# Altium PCB PCB.PcbDoc (part 1 of 2)
Units mm, origin at the board's own origin, x right, y up, seen from the top; angles counter-clockwise.
Board outline 55 x 55 mm, 6 copper layers (Top Layer, Layer 1, Layer 3, Layer 4, Layer 2, Bottom Layer), stack 1.211 mm thick; 156 components, 99 nets, 477 pads, 0 vias.
Unrouted connection lines stored in the file: 307.
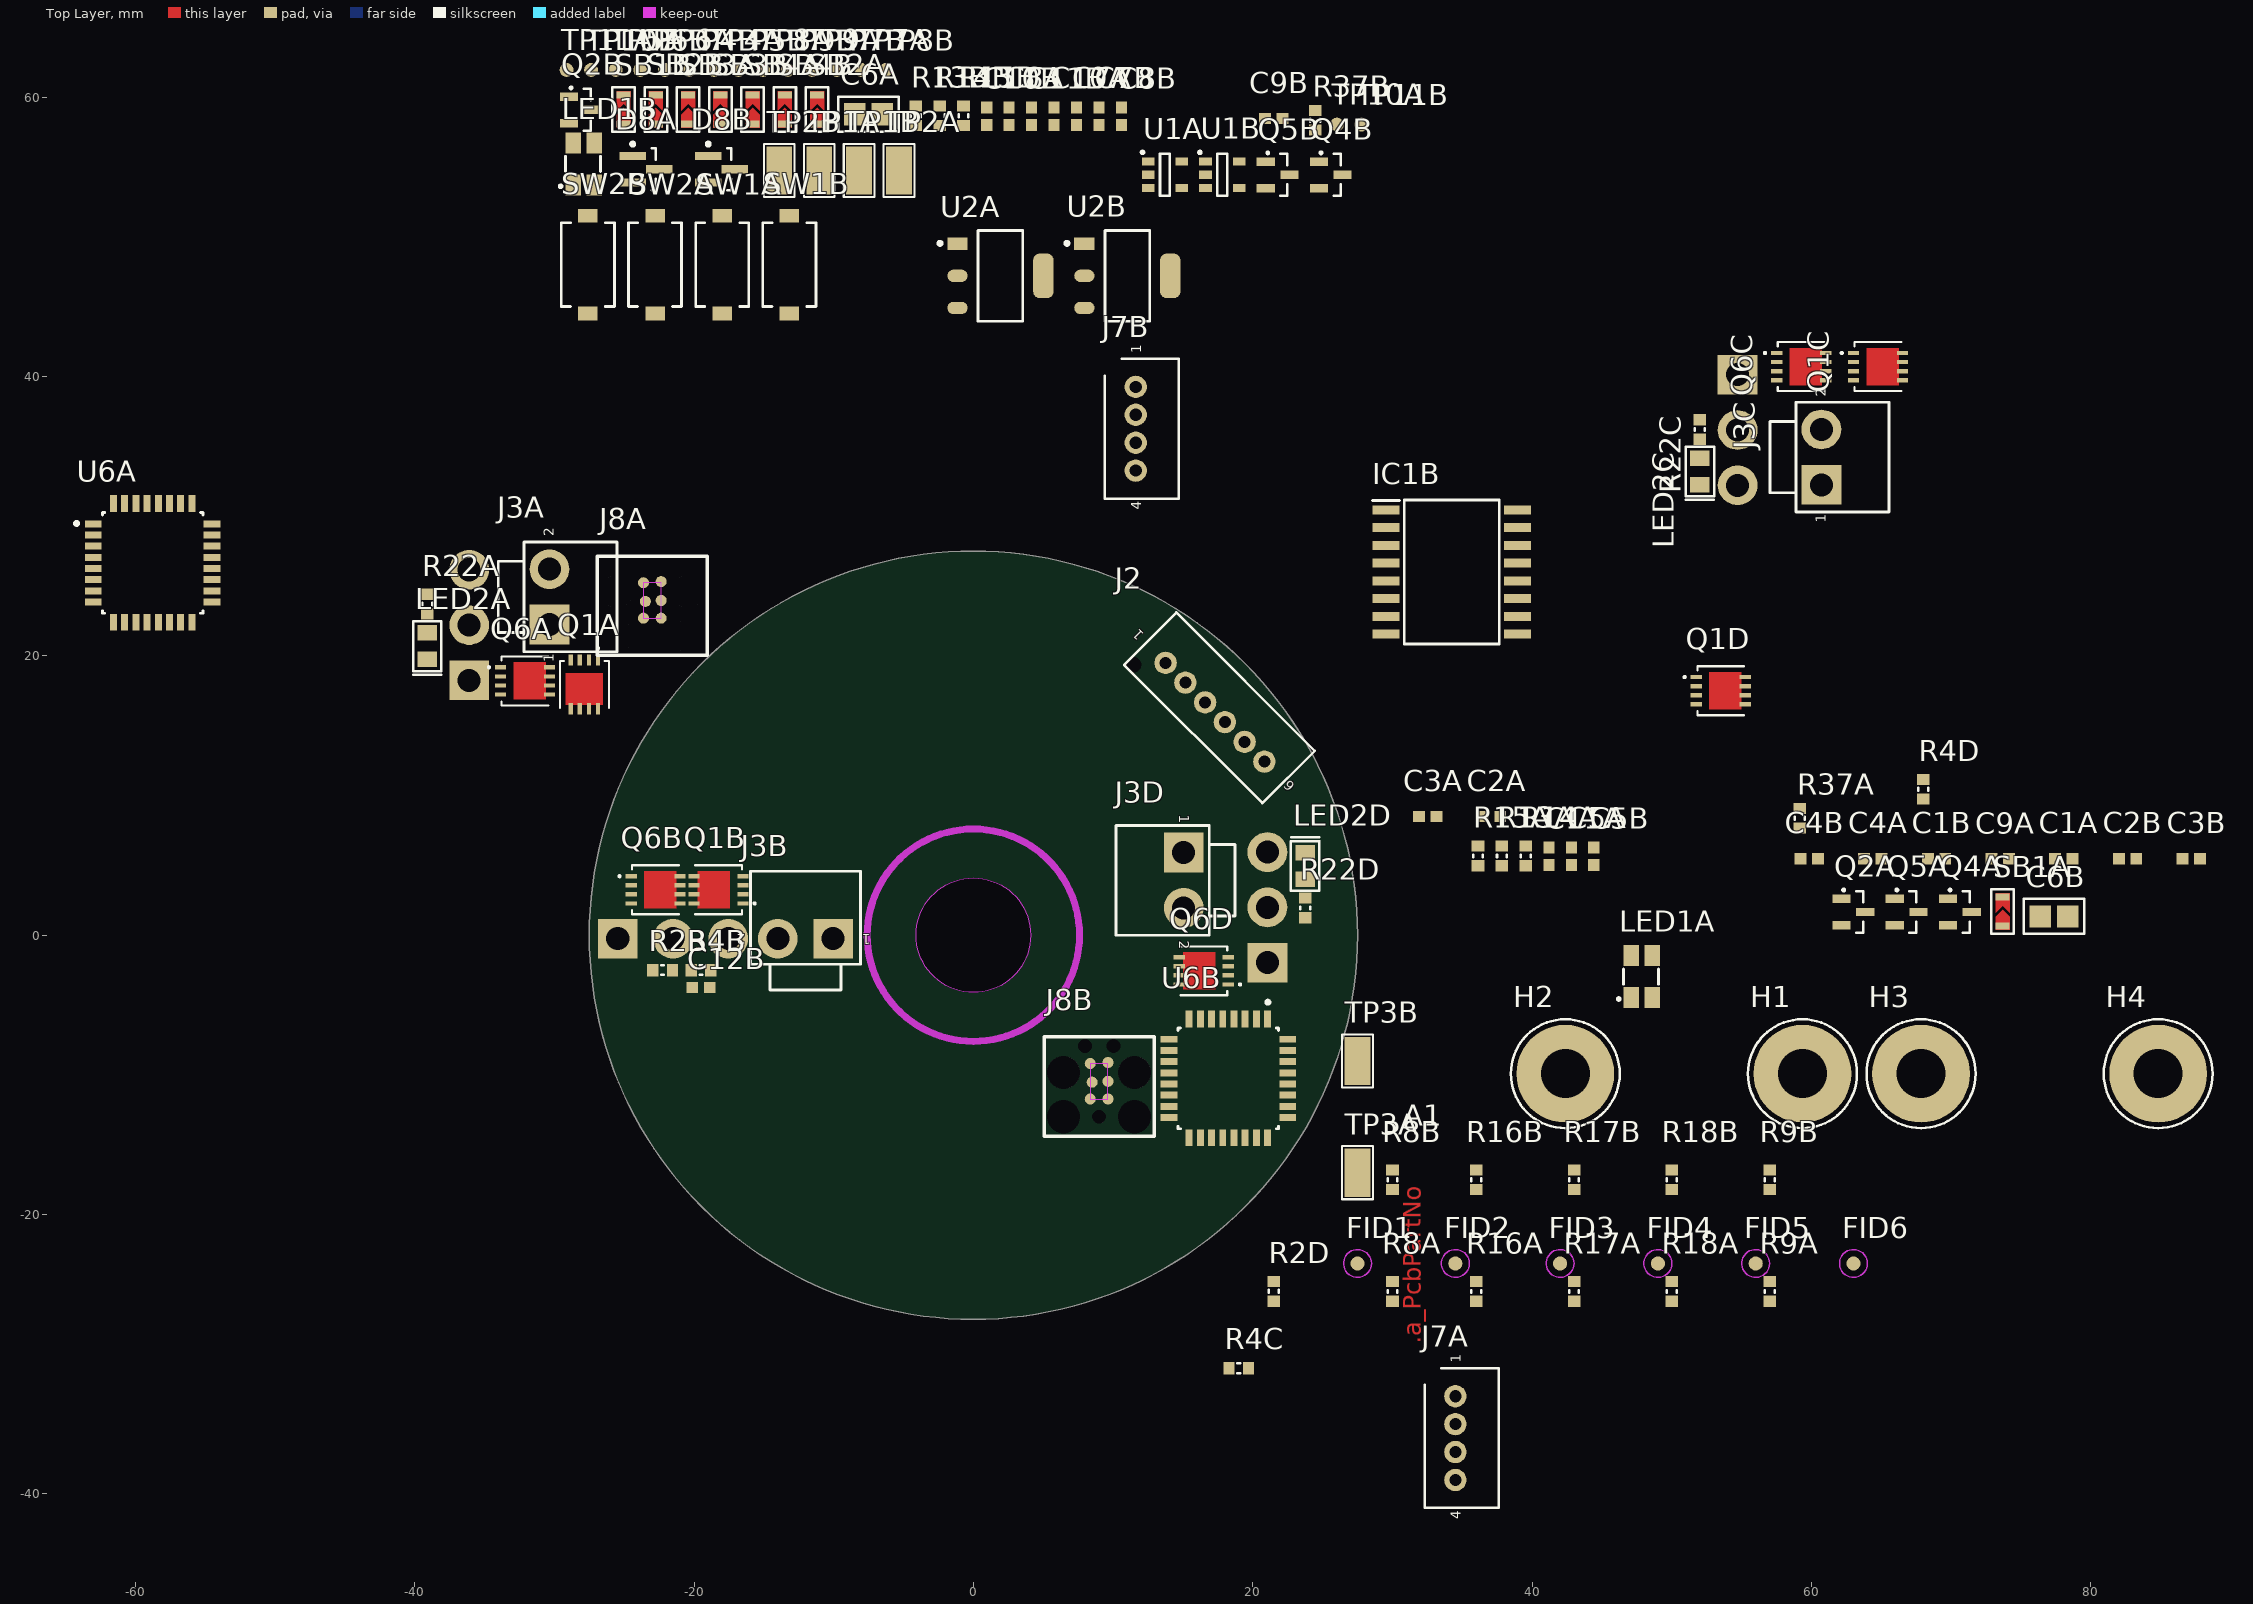
[diagram p0: Top Layer view]
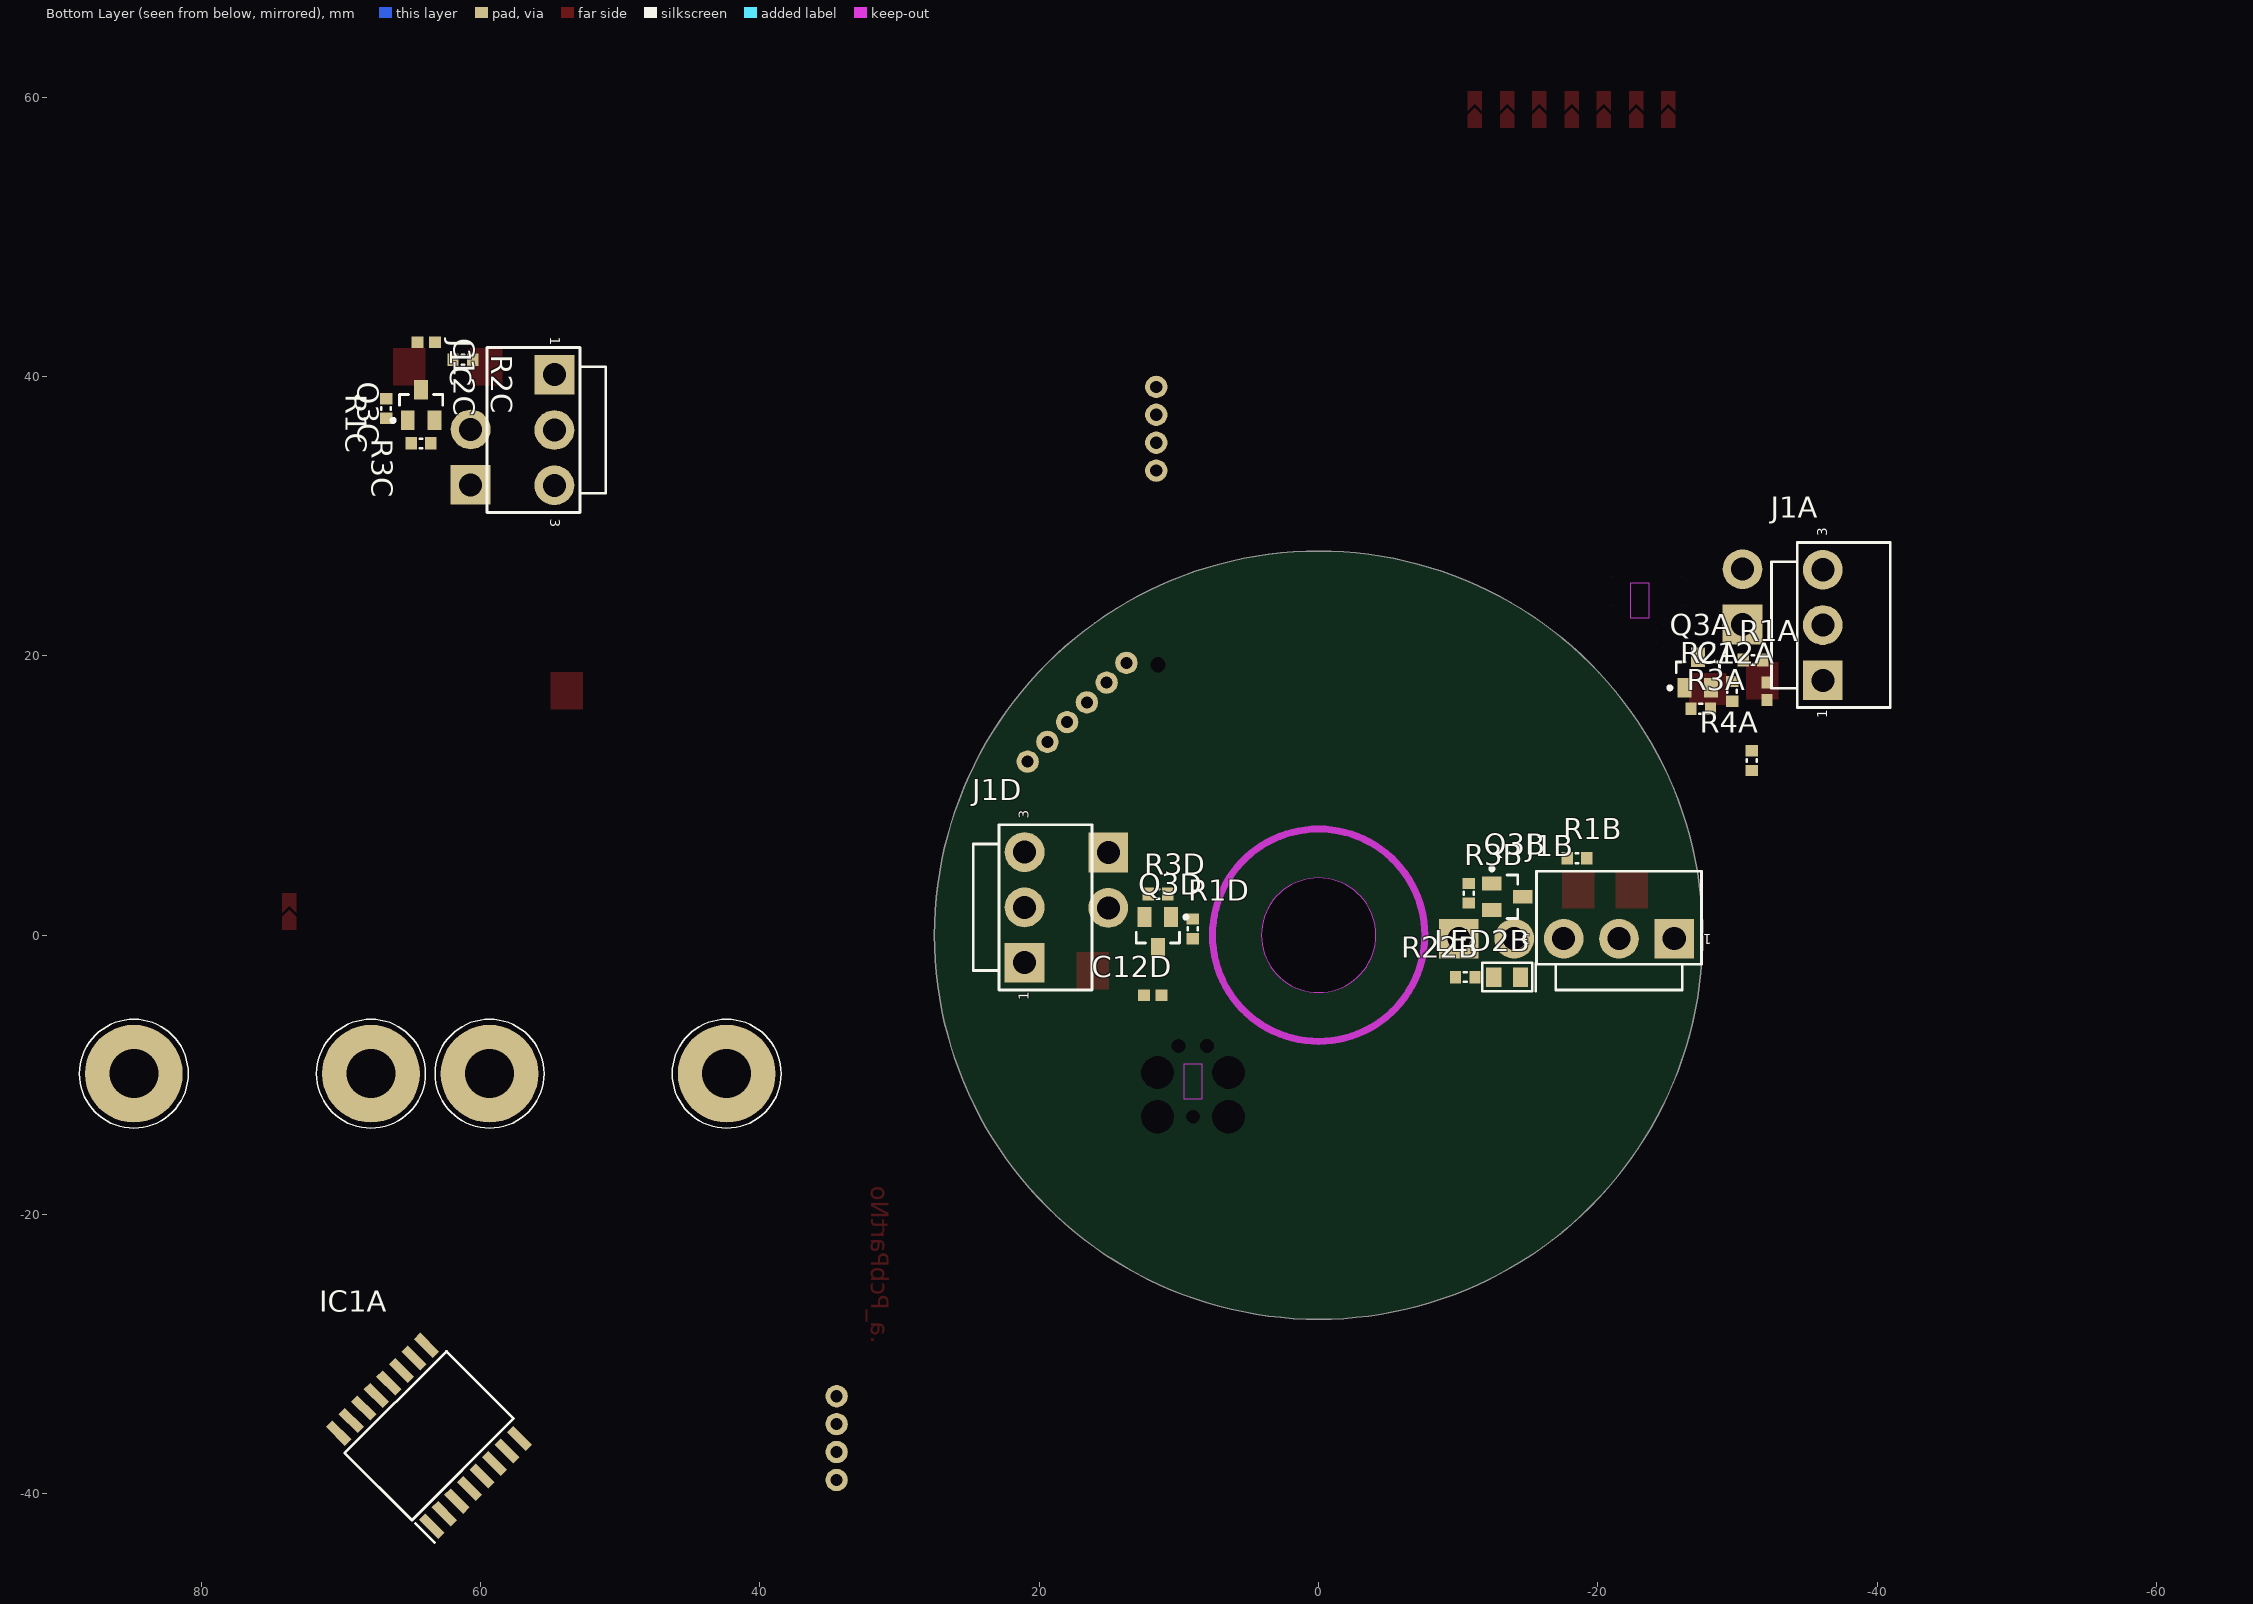
[diagram p1: Bottom Layer view, seen from below]
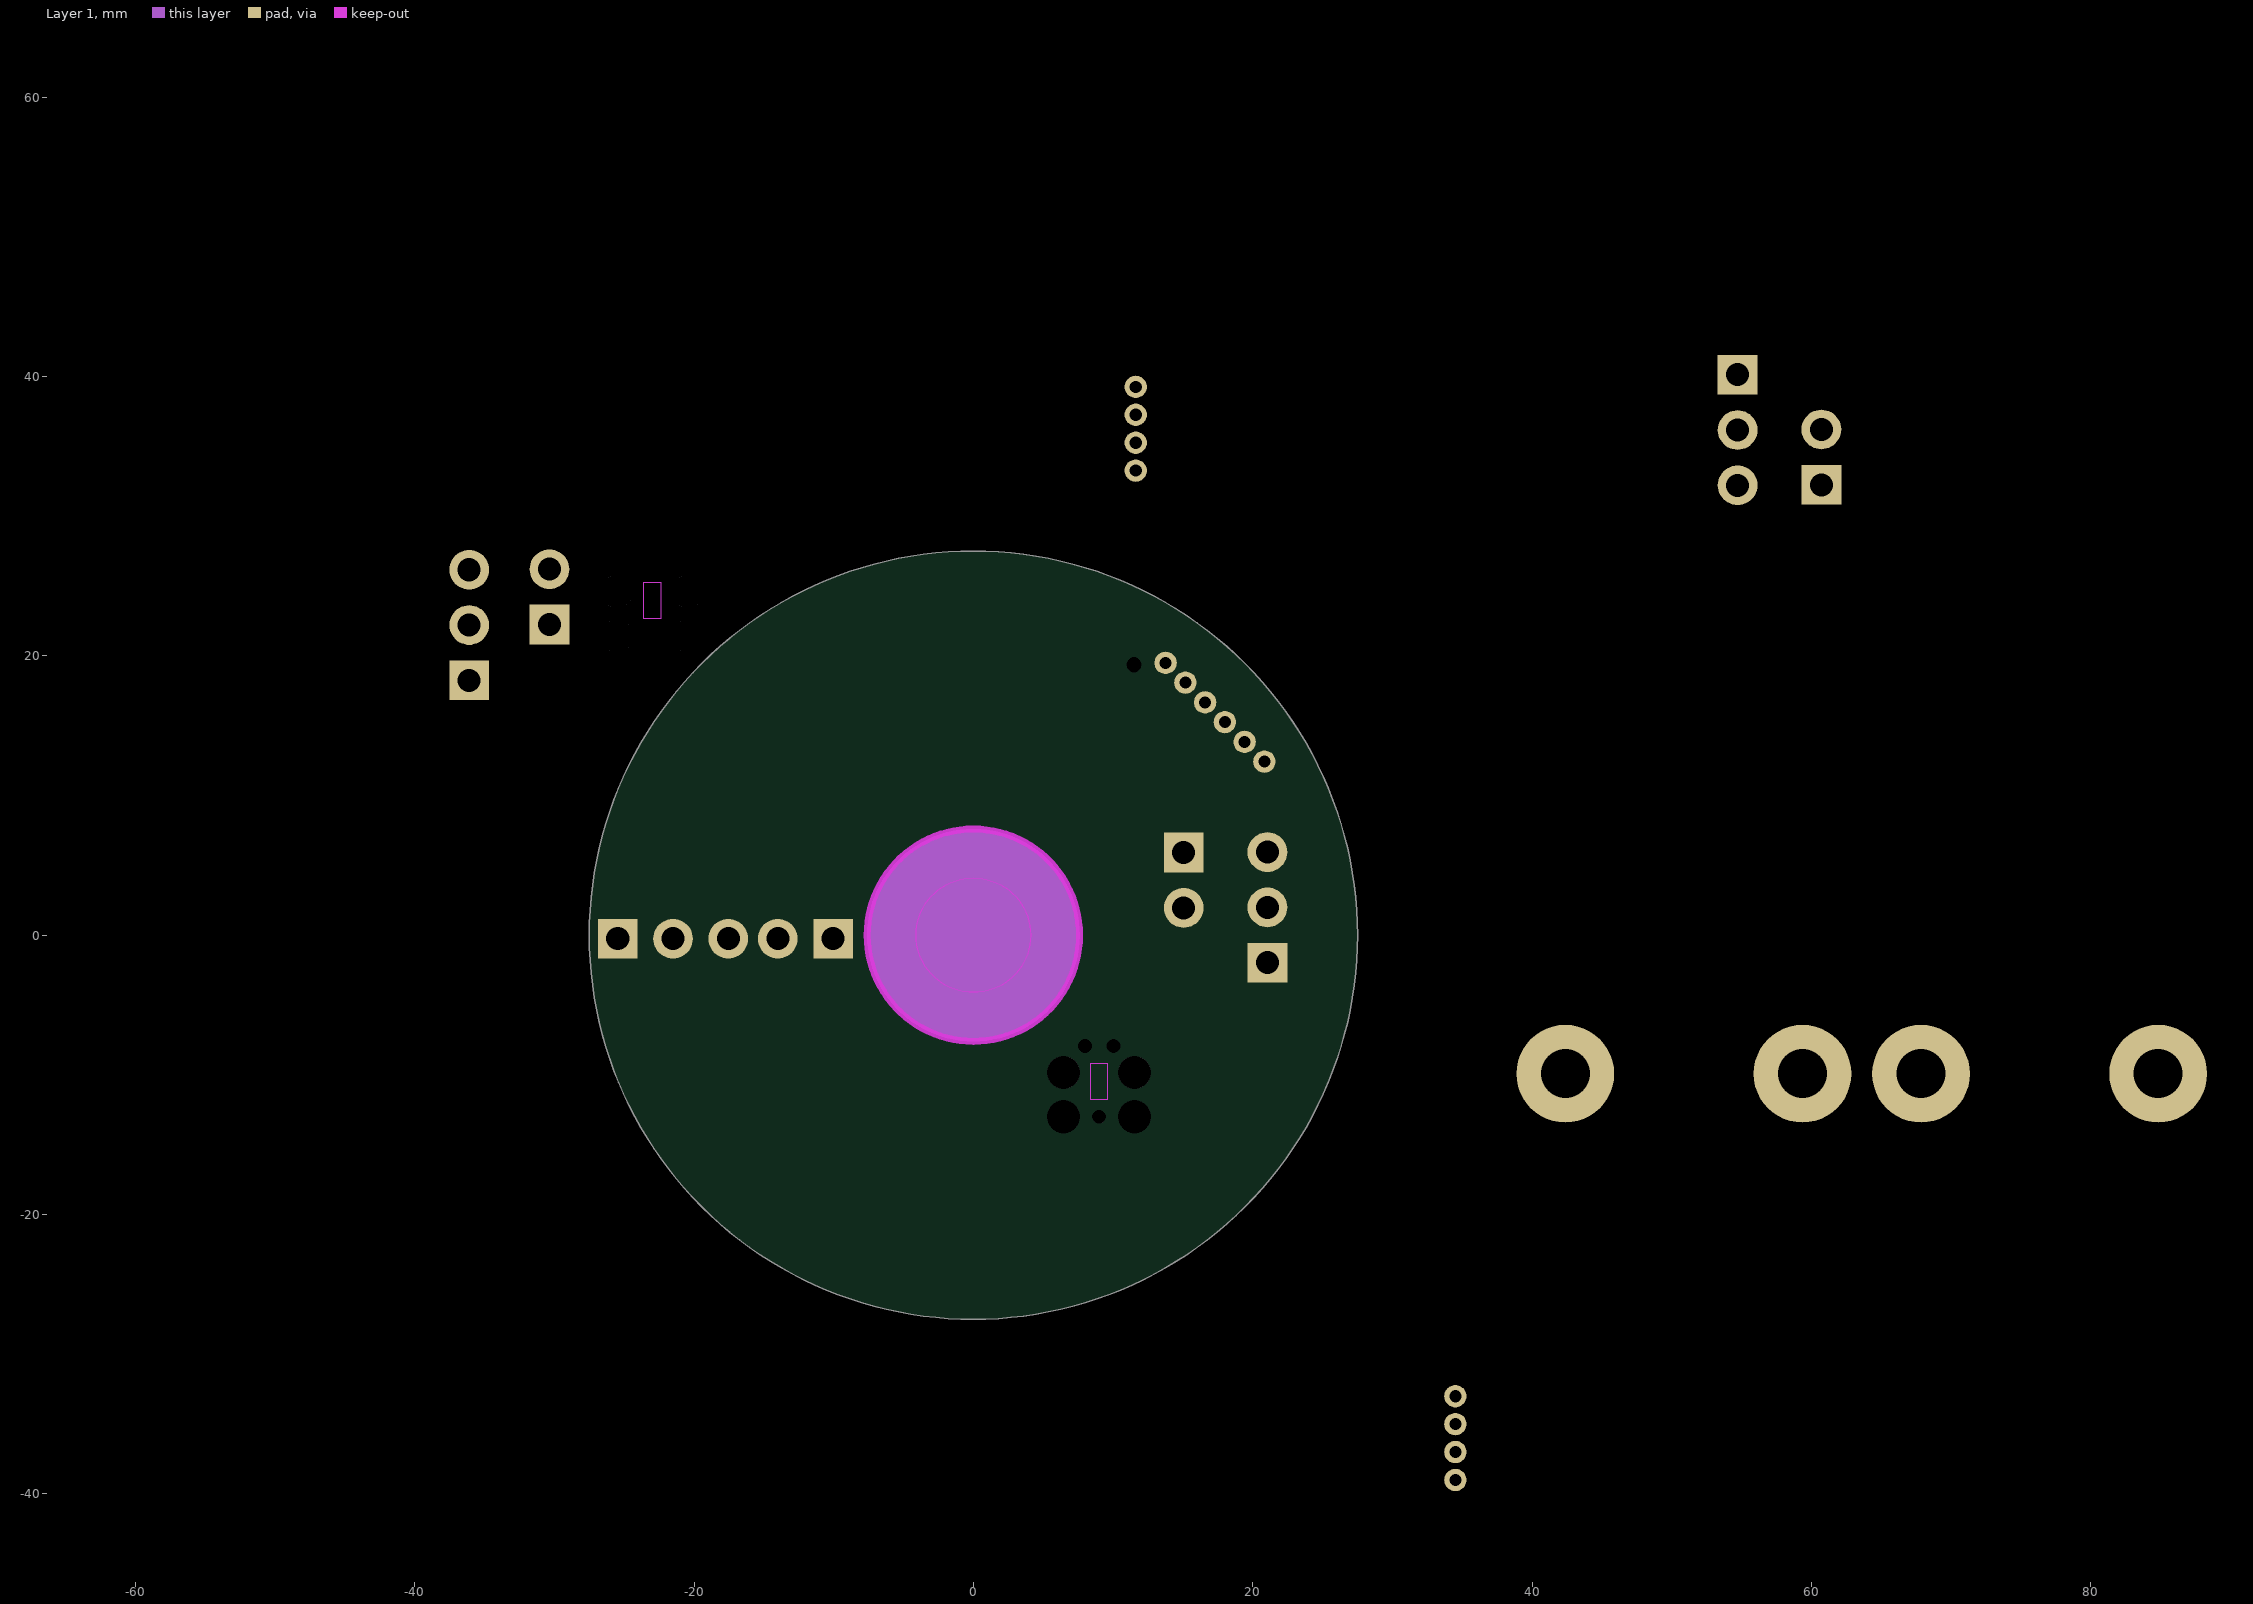
[diagram p2: Layer 1]

## Layer stack, top to bottom
Top Solder: solder mask 0.0102, Solder Resist, Dk 3.5
Top Layer: signal copper 0.0356
Dielectric 2: prepreg 0.2, PP-006, Dk 4.1
Layer 1: signal copper 0.035
Dielectric 4: core 0.2, Core-009, Dk 4.5
Layer 3: signal copper 0.035
Dielectric 1: prepreg 0.2, FR-4, Dk 4.8
Layer 4: signal copper 0.035
Dielectric 5: core 0.2, Core-009, Dk 4.5
Layer 2: signal copper 0.035
Dielectric 3: prepreg 0.2, PP-006, Dk 4.1
Bottom Layer: signal copper 0.0356
Bottom Solder: solder mask 0.0102, Solder Resist, Dk 3.5

## Board outline
0,-27.5 cw(c0,0) -27.5,0 cw(c0,0) 0,27.5 cw(c0,0) 27.5,0 cw(c0,0)
cut-out: 0,-4.1 cw(c0,0) -4.1,0 cw(c0,0) 0,4.1 cw(c0,0) 4.1,0 cw(c0,0)

## Design rules (kind name [scope] priority, off if disabled: settings)
Clearance [All] p1: gap=0.254 ignorepadtopadclearanceinfootprint=FALSE
PolygonConnect [All] p1: connectstyle=Relief reliefconductorwidth=0.254 reliefentries=4 polygonreliefangle="90 Angle" airgapwidth=0.254
RoomDefinition "U_Output Stages_S1" [InComponentClass('U_Output Stages_S1')] p1: confinementstyle=ConfineIn formatcopy=FALSE lockcomponents=FALSE outline 50.449,29 50.449,43.175 62.399,43.175 62.399,43.255 65.357,43.255 65.357,43.164 67.75,43.164 67.75,38.237 67.607,38.237 67.607,36.197 66.757,36.197 66.757,35.772 66.117,35.772 66.117,29.187 60.117,29.187 60.117,29
RoomDefinition "U_Output Stages_P2" [InComponentClass('U_Output Stages_P2')] p2: confinementstyle=ConfineIn formatcopy=TRUE lockcomponents=FALSE outline -28,-4.75 -7.5,-4.75 -7.5,6.5 -28,6.5
RoomDefinition "U_Output Stages_P1" [InComponentClass('U_Output Stages_P1')] p3: confinementstyle=ConfineIn formatcopy=FALSE lockcomponents=FALSE outline -41.5,15 -41.5,29.175 -29.55,29.175 -29.55,29.255 -26.592,29.255 -26.592,29.164 -24.199,29.164 -24.199,24.237 -24.342,24.237 -24.342,22.197 -25.192,22.197 -25.192,21.772 -25.832,21.772 -25.832,15.187 -31.832,15.187 -31.832,15
RoomDefinition "U_Output Stages_S2" [InComponentClass('U_Output Stages_S2')] p4: confinementstyle=ConfineIn formatcopy=FALSE lockcomponents=FALSE outline 25.304,9.151 25.304,-5.024 13.354,-5.024 13.354,-5.104 10.396,-5.104 10.396,-5.014 8.003,-5.014 8.003,-0.086 8.146,-0.086 8.146,1.954 8.996,1.954 8.996,2.379 9.636,2.379 9.636,8.964 15.636,8.964 15.636,9.151
RoomDefinition Microcontroller_S [InComponentClass('Microcontroller_S')] p5: confinementstyle=ConfineIn formatcopy=TRUE lockcomponents=FALSE outline -300,-300 -249.2,-300 -249.2,-274.6 -300,-274.6
RoomDefinition Microcontroller_P [InComponentClass('Microcontroller_P')] p6: confinementstyle=ConfineIn formatcopy=TRUE lockcomponents=FALSE outline -300,-300 -249.2,-300 -249.2,-274.6 -300,-274.6
RoomDefinition "Top Sheet" [InComponentClass('Top Sheet')] p7: confinementstyle=ConfineIn formatcopy=TRUE lockcomponents=FALSE outline -87,-177 -17,-177 -17,-145 -87,-145
RoutingVias [All] p1: holewidth=0.711 width=1.27 viastyle="Through Hole" minholewidth=0.711 minwidth=1.27 maxholewidth=0.711 maxwidth=1.27
SolderMaskExpansion [All] p1: expansion=0.102 istentingtop=FALSE
SupplyNets "Schematic Supply Nets_1" [InNet('GNDA')] p1: voltage=0.000
Width [All] p1: maxlimit=0.254 minlimit=0.254 preferedwidth=0.254
30 further rules are at their usual default settings.

## Classes and differential pairs
component class "U_Output Stages_S2": C12D J1D J3D LED2D Q1D Q3D Q6D R1D R2D R3D R4D R22D
component class Microcontroller_P: C1A C2A C3A C4A C5A C6A C7A C8A C9A C10A C11A D8A IC1A J7A J8A LED1A Q2A Q4A Q5A R8A R9A R13A R14A R15A R16A R17A R18A R37A SB1A SB2A SB3A SB4A SW1A SW2A TP1A TP2A TP3A TP4A TP5A TP6A TP7A TP8A TP9A TP10A TP11A U1A U2A U6A
channel class Microcontroller: Microcontroller_P Microcontroller_S
net class "Primary Power Domain": GNDA NetJ1A_1 NetJ1A_2 NetJ1B_1 NetJ1B_2 NetJ3A_1 NetJ3B_1 NetLED2A_2 NetLED2B_2 NetQ1A_4 NetQ1B_4 PRIMARY_OUT_EN_1 PRIMARY_OUT_EN_2 PRIMARY_VBATT_1 PRIMARY_VBATT_2 PRIMARY_VBATT_SENSE_1 PRIMARY_VBATT_SENSE_2
net class "Secondary Power Domain": GNDA NetJ1C_1 NetJ1C_2 NetJ1D_1 NetJ1D_2 NetJ3C_1 NetJ3D_1 NetLED2C_2 NetLED2D_2 NetQ1C_4 NetQ1D_4 SECONDARY_OUT_EN_1 SECONDARY_OUT_EN_2 SECONDARY_VBATT_1 SECONDARY_VBATT_2 SECONDARY_VBATT_SENSE_1 SECONDARY_VBATT_SENSE_2
net class "Isolated Comms Domain": ISO_5VA ISO_GNDA NetIC1A_11 NetIC1A_12 NetIC1A_13 NetIC1A_14
component class "U_Output Stages_P1": C12A J1A J3A LED2A Q1A Q3A Q6A R1A R2A R3A R4A R22A
component class Microcontroller_S: C1B C2B C3B C4B C5B C6B C7B C8B C9B C10B C11B D8B IC1B J7B J8B LED1B Q2B Q4B Q5B R8B R9B R13B R14B R15B R16B R17B R18B R37B SB1B SB2B SB3B SB4B SW1B SW2B TP1B TP2B TP3B TP4B TP5B TP6B TP7B TP8B TP9B TP10B TP11B U1B U2B U6B
channel class "Output Stages": "U_Output Stages_P1" "U_Output Stages_P2" "U_Output Stages_S1" "U_Output Stages_S2"
component class "U_Output Stages_S1": C12C J1C J3C LED2C Q1C Q3C Q6C R1C R2C R3C R4C R22C
component class "U_Output Stages_P2": C12B J1B J3B LED2B Q1B Q3B Q6B R1B R2B R3B R4B R22B
component class "Top Sheet": A1 FID1 FID2 FID3 FID4 FID5 FID6 H1 H2 H3 H4 J2

## Components (designator, comment, footprint, x,y, rotation, side; value= is the part's Value field where it differs from the comment)
A1 "*" PCB 32.008,-29.242 r90 top
C1A "*" CAPC1608X08L 78.063,5.474 r0 top value=100nF (schematic designator C1)
C1B "*" CAPC1608X08L 68.947,5.474 r0 top value=100nF (schematic designator C1)
C2A "*" CAPC1608X08L 37.091,8.488 r0 top value=100nF (schematic designator C2)
C2B "*" CAPC1608X08L 82.621,5.474 r0 top value=100nF (schematic designator C2)
C3A "*" CAPC1608X08L 32.533,8.488 r0 top value=100nF (schematic designator C3)
C3B "*" CAPC1608X08L 87.179,5.474 r0 top value=100nF (schematic designator C3)
C4A "*" CAPC1608X08L 64.389,5.474 r0 top value=1uF (schematic designator C4)
C4B "*" CAPC1608X08L 59.831,5.474 r0 top value=1uF (schematic designator C4)
C5A "*" CAPC1608X08L 42.806,5.649 r90 top value=100nF (schematic designator C5)
C5B "*" CAPC1608X08L 44.414,5.649 r90 top value=100nF (schematic designator C5)
C6A "*" CAPC2012X15M -7.507,58.756 r0 top value=10uF (schematic designator C6)
C6B "*" CAPC2012X15M 77.353,1.341 r0 top value=10uF (schematic designator C6)
C7A "*" CAPC1608X08L 7.382,58.631 r90 top value=100nF (schematic designator C7)
C7B "*" CAPC1608X08L 8.99,58.631 r90 top value=100nF (schematic designator C7)
C8A "*" CAPC1608X08L 2.558,58.631 r90 top value=100nF (schematic designator C8)
C8B "*" CAPC1608X08L 10.598,58.631 r90 top value=100nF (schematic designator C8)
C9A "*" CAPC1608X08L 73.505,5.474 r0 top value=100nF (schematic designator C9)
C9B "*" CAPC1608X08L 21.505,58.456 r0 top value=100nF (schematic designator C9)
C10A "*" CAPC1608X08L 5.774,58.631 r90 top value=100nF (schematic designator C10)
C10B "*" CAPC1608X08L 0.95,58.631 r90 top value=100nF (schematic designator C10)
C11A "*" CAPC1608X08L 41.198,5.649 r90 top value=100nF (schematic designator C11)
C11B "*" CAPC1608X08L 4.166,58.631 r90 top value=100nF (schematic designator C11)
C12A "*" CAPC1608X08L -32.096,17.451 r270 bottom value=100nF (schematic designator C12)
C12B "*" CAPC1608X08L -19.5,-3.75 r0 top value=100nF (schematic designator C12)
C12C "*" CAPC1608X08L 63.878,42.451 r0 bottom value=100nF (schematic designator C12)
C12D "*" CAPC1608X08L 11.875,-4.3 r180 bottom value=100nF (schematic designator C12)
D8A "*" SOT95P237X112-3M -23.438,54.828 r0 top (schematic designator D8)
D8B "*" SOT95P237X112-3M -18.03,54.828 r0 top (schematic designator D8)
FID1 "*" FIDRT 27.499,-23.501 r90 top
FID2 "*" FIDRT 34.499,-23.501 r90 top
FID3 "*" FIDRT 41.999,-23.501 r90 top
FID4 "*" FIDRT 48.999,-23.501 r90 top
FID5 "*" FIDRT 55.999,-23.501 r90 top
FID6 "*" FIDRT 62.999,-23.501 r90 top
H1 "MT3PS" MT3PF 59.348,-9.915 r0 top
H2 "MT3PS" MT3PF 42.372,-9.915 r0 top
H3 "MT3PS" MT3PF 67.836,-9.915 r0 top
H4 "MT3PS" MT3PF 84.812,-9.915 r0 top
IC1A "RS485 Transceiver" SOIC127P1032X265-16N 63.673,-35.837 r45 bottom (schematic designator IC1)
IC1B "RS485 Transceiver" SOIC127P1032X265-16N 34.25,26 r0 top (schematic designator IC1)
J1A "BATTERY INPUT" B3P-VH -36.096,18.241 r90 bottom (schematic designator J1)
J1B "BATTERY INPUT" B3P-VH -25.46,-0.25 r0 bottom (schematic designator J1)
J1C "BATTERY INPUT" B3P-VH 54.703,40.121 r270 bottom (schematic designator J1)
J1D "BATTERY INPUT" B3P-VH 21.05,-1.97 r90 bottom (schematic designator J1)
J2 "Mag Con" B06B-PASK-1 17.293,15.957 r135 top
J3A "OUT" B2P-VH -30.346,22.241 r90 top (schematic designator J3)
J3B "OUT" B2P-VH -10.04,-0.25 r180 top (schematic designator J3)
J3C "OUT" B2P-VH 60.703,32.241 r90 top (schematic designator J3)
J3D "OUT" B2P-VH 15.05,5.91 r270 top (schematic designator J3)
J7A "Serial Debug" B04B-PASK-1 34.5,-36 r90 top (schematic designator J7)
J7B "Serial Debug" B04B-PASK-1 11.618,36.252 r90 top (schematic designator J7)
J8A "TC2030-IDC TAG CONNECT PADS" TC2030-IDC -22.984,21.42 r90 top (schematic designator J8)
J8B "TC2030-IDC Tag Connect Pads" TC2030-IDC 9,-13 r90 top (schematic designator J8)
LED1A "Visual Status Indicator" ASMB-MTB0-0A3A2 47.846,-2.967 r0 top (schematic designator LED1)
LED1B "Visual Status Indicator" ASMB-MTB0-0A3A2 -27.896,55.208 r0 top (schematic designator LED1)
LED2A "ON" CAPCP2012X11N -39.096,20.701 r90 top (schematic designator LED2)
LED2B "ON" CAPCP2012X11N -13.5,-3 r0 bottom (schematic designator LED2)
LED2C "ON" CAPCP2012X11N 52.003,33.201 r90 top (schematic designator LED2)
LED2D "ON" CAPCP2012X11N 23.75,4.95 r270 top (schematic designator LED2)
Q1A "*" MLPAK33_SOT8002-1_NEX-M -27.846,17.951 r270 top (schematic designator Q1)
Q1B "*" MLPAK33_SOT8002-1_NEX-M -18.25,3.25 r180 top (schematic designator Q1)
Q1C "*" MLPAK33_SOT8002-1_NEX-M 64.753,40.701 r0 top (schematic designator Q1)
Q1D "*" MLPAK33_SOT8002-1_NEX-M 53.499,17.499 r0 top (schematic designator Q1)
Q2A "FET_N_GSD_DIOGS" SOT95P237X112-3L 62.996,1.661 r0 top (schematic designator Q2)
Q2B "FET_N_GSD_DIOGS" SOT95P237X112-3L -28.096,59.076 r0 top (schematic designator Q2)
Q3A "BSS138" FAIR-SOT23-3_V -27.146,18.801 r90 bottom (schematic designator Q3)
Q3B "BSS138" FAIR-SOT23-3_V -13.5,2.75 r180 bottom (schematic designator Q3)
Q3C "BSS138" FAIR-SOT23-3_V 64.253,37.951 r90 bottom (schematic designator Q3)
Q3D "BSS138" FAIR-SOT23-3_V 11.5,0.2 r270 bottom (schematic designator Q3)
Q4A "FET_N_GSD_DIOGS" SOT95P237X112-3L 70.612,1.661 r0 top (schematic designator Q4)
Q4B "FET_N_GSD_DIOGS" SOT95P237X112-3L 25.582,54.428 r0 top (schematic designator Q4)
Q5A "FET_N_GSD_DIOGS" SOT95P237X112-3L 66.804,1.661 r0 top (schematic designator Q5)
Q5B "FET_N_GSD_DIOGS" SOT95P237X112-3L 21.774,54.428 r0 top (schematic designator Q5)
Q6A "Reverse Polarity Protection" MLPAK33_SOT8002-1_NEX-M -32.096,18.201 r0 top (schematic designator Q6)
Q6B "Reverse Polarity Protection" MLPAK33_SOT8002-1_NEX-M -22.75,3.25 r0 top (schematic designator Q6)
Q6C "Reverse Polarity Protection" MLPAK33_SOT8002-1_NEX-M 59.253,40.701 r0 top (schematic designator Q6)
Q6D "Reverse Polarity Protection" MLPAK33_SOT8002-1_NEX-M 16.5,-2.55 r180 top (schematic designator Q6)
R1A "*" RESC1608X06L -31.096,19.701 r0 bottom value=10K (schematic designator R1)
R1B "*" RESC1608X06L -18.5,5.5 r0 bottom value=10K (schematic designator R1)
R1C "*" RESC1608X06L 66.753,37.701 r270 bottom value=10K (schematic designator R1)
R1D "*" RESC1608X06L 9,0.45 r90 bottom value=10K (schematic designator R1)
R2A "*" RESC1608X06L -29.596,17.451 r270 bottom value=30K (schematic designator R2)
R2B "*" RESC1608X06L -22.25,-2.5 r180 top value=30K (schematic designator R2)
R2C "*" RESC1608X06L 61.253,41.201 r180 bottom value=30K (schematic designator R2)
R2D "*" RESC1608X06L 21.5,-25.5 r90 top value=30K (schematic designator R2)
R3A "*" RESC1608X06L -27.346,16.201 r0 bottom value=10K (schematic designator R3)
R3B "*" RESC1608X06L -10.75,3 r90 bottom value=10K (schematic designator R3)
R3C "*" RESC1608X06L 64.253,35.201 r0 bottom value=10K (schematic designator R3)
R3D "*" RESC1608X06L 11.5,2.95 r180 bottom value=10K (schematic designator R3)
R4A "*" RESC1608X06L -31,12.5 r90 bottom value=10K (schematic designator R4)
R4B "*" RESC1608X06L -19.5,-2.5 r180 top value=10K (schematic designator R4)
R4C "*" RESC1608X06L 19,-31 r0 top value=10K (schematic designator R4)
R4D "*" RESC1608X06L 68.001,10.437 r90 top value=10K (schematic designator R4)
R8A "RESISTOR" RESC1608X06L 29.999,-25.501 r90 top value=4K7 (schematic designator R8)
R8B "RESISTOR" RESC1608X06L 29.999,-17.501 r90 top value=4K7 (schematic designator R8)
R9A "RESISTOR" RESC1608X06L 56.999,-25.501 r90 top value=4K7 (schematic designator R9)
R9B "RESISTOR" RESC1608X06L 56.999,-17.501 r90 top value=4K7 (schematic designator R9)
R13A "*" RESC1608X06L 37.832,5.674 r90 top value=15R (schematic designator R13)
R13B "*" RESC1608X06L -4.124,58.656 r90 top value=15R (schematic designator R13)
R14A "*" RESC1608X06L 39.54,5.674 r90 top value=24R (schematic designator R14)
R14B "*" RESC1608X06L -2.416,58.656 r90 top value=24R (schematic designator R14)
R15A "*" RESC1608X06L 36.124,5.674 r90 top value=68R (schematic designator R15)
R15B "*" RESC1608X06L -0.708,58.656 r90 top value=68R (schematic designator R15)
R16A "RESISTOR" RESC1608X06L 35.999,-25.501 r90 top value=4K7 (schematic designator R16)
R16B "RESISTOR" RESC1608X06L 35.999,-17.501 r90 top value=4K7 (schematic designator R16)
R17A "RESISTOR" RESC1608X06L 42.999,-25.501 r90 top value=4K7 (schematic designator R17)
R17B "RESISTOR" RESC1608X06L 42.999,-17.501 r90 top value=4K7 (schematic designator R17)
R18A "RESISTOR" RESC1608X06L 49.999,-25.501 r90 top value=4K7 (schematic designator R18)
R18B "RESISTOR" RESC1608X06L 49.999,-17.501 r90 top value=4K7 (schematic designator R18)
R22A "*" RESC1608X06L -39.096,23.701 r90 top value=560R (schematic designator R22)
R22B "*" RESC1608X06L -10.5,-3 r0 bottom value=560R (schematic designator R22)
R22C "*" RESC1608X06L 52.003,36.201 r90 top value=560R (schematic designator R22)
R22D "*" RESC1608X06L 23.75,1.95 r270 top value=560R (schematic designator R22)
R37A "*" RESC1608X06L 59.151,8.363 r90 top value=10K (schematic designator R37)
R37B "*" RESC1608X06L 24.463,58.331 r90 top value=10K (schematic designator R37)
SB1A "Solder Blob Closed" 0603SolderLinkClosed 73.67,1.691 r90 top (schematic designator SB1)
SB1B "Solder Blob Closed" 0603SolderLinkClosed -25.038,59.106 r90 top (schematic designator SB1)
SB2A "Solder Blob Closed" 0603SolderLinkClosed -11.19,59.106 r90 top (schematic designator SB2)
SB2B "Solder Blob Closed" 0603SolderLinkClosed -22.73,59.106 r90 top (schematic designator SB2)
SB3A "Solder Blob Closed" 0603SolderLinkClosed -20.422,59.106 r90 top (schematic designator SB3)
SB3B "Solder Blob Closed" 0603SolderLinkClosed -18.114,59.106 r90 top (schematic designator SB3)
SB4A "Solder Blob Closed" 0603SolderLinkClosed -15.806,59.106 r90 top (schematic designator SB4)
SB4B "Solder Blob Closed" 0603SolderLinkClosed -13.498,59.106 r90 top (schematic designator SB4)
SW1A "Boot" SW_KSR -17.98,48 r90 top (schematic designator SW1)
SW1B "Boot" SW_KSR -13.172,48 r90 top (schematic designator SW1)
SW2A "RESET" SW_KSR -22.788,48 r90 top (schematic designator SW2)
SW2B "RESET" SW_KSR -27.596,48 r90 top (schematic designator SW2)
TP1A "GND" S1751-46R -11.039,54.733 r90 top (schematic designator TP1)
TP1B "GND" S1751-46R -8.181,54.733 r90 top (schematic designator TP1)
TP2A "GND" S1751-46R -5.323,54.733 r90 top (schematic designator TP2)
TP2B "GND" S1751-46R -13.897,54.733 r90 top (schematic designator TP2)
TP3A "GND" S1751-46R 27.499,-17.001 r90 top (schematic designator TP3)
TP3B "GND" S1751-46R 27.499,-9.001 r90 top (schematic designator TP3)
TP4A "TMS" TP1 -18.573,61.939 r90 top (schematic designator TP4)
TP4B "TMS" TP1 -20.331,61.939 r90 top (schematic designator TP4)
TP5A "TMS" TP1 -25.605,61.939 r90 top (schematic designator TP5)
TP5B "TMS" TP1 -16.815,61.939 r90 top (schematic designator TP5)
TP6A "TMS" TP1 -22.089,61.939 r90 top (schematic designator TP6)
TP6B "TMS" TP1 -23.847,61.939 r90 top (schematic designator TP6)
TP7A "TMS" TP1 -8.025,61.939 r90 top (schematic designator TP7)
TP7B "TMS" TP1 -9.783,61.939 r90 top (schematic designator TP7)
TP8A "TMS" TP1 -15.057,61.939 r90 top (schematic designator TP8)
TP8B "TMS" TP1 -6.267,61.939 r90 top (schematic designator TP8)
TP9A "TMS" TP1 -11.541,61.939 r90 top (schematic designator TP9)
TP9B "TMS" TP1 -13.299,61.939 r90 top (schematic designator TP9)
TP10A "TMS" TP1 26.021,58.031 r90 top (schematic designator TP10)
TP10B "TMS" TP1 -27.363,61.939 r90 top (schematic designator TP10)
TP11A "TMS" TP1 -29.121,61.939 r90 top (schematic designator TP11)
TP11B "TMS" TP1 27.779,58.031 r90 top (schematic designator TP11)
U1A "Power On Reset" SOT95P280X145-5L 13.708,54.433 r0 top (schematic designator U1)
U1B "Power On Reset" SOT95P280X145-5L 17.816,54.433 r0 top (schematic designator U1)
U2A "MIC5200-3.3YS" FP-SOT223-3LD-PL-1-IPC_C 1.935,47.2 r0 top (schematic designator U2)
U2B "MIC5200-3.3YS" FP-SOT223-3LD-PL-1-IPC_C 11.02,47.2 r0 top (schematic designator U2)
U6A "Microcontroller" FP-LQFP32-5V-MFG -58.75,26.65 r0 top (schematic designator U6)
U6B "Microcontroller" FP-LQFP32-5V-MFG 18.25,-10.25 r270 top (schematic designator U6)

## Footprints (in the part's own frame and the unit in brackets; to place one, negate y for a bottom-side part, rotate by r counter-clockwise, add the part's x,y. Pads: shape width x height; smd on the part's side, far side on the other; paste and mask are expansions set on the pad)
0603SolderLinkClosed [mm] "0603 Solder Link - Closed"
  rect 0.5x1 smd paste-0.5: 1(-1.05,0) 2(1.05,0)
  Top Layer region: 1.3,-0.5 -0.075,-0.5 0.425,0 -0.075,0.5 1.3,0.5
  Top Layer region: -1.3,0.5 -0.375,0.5 0.125,0 -0.375,-0.5 -1.3,-0.5
  silkscreen extent -1.6,-0.8 1.6,0.8, body extent -0.85,-0.48 0.85,0.47, height 0.55
ASMB-MTB0-0A3A2 [mm] "PLCC-4 Tricolor Black Surface LED"
  rect 1.1x1.5 smd: 1(-0.75,-1.5) 2(-0.75,1.5) 3(0.75,1.5) 4(0.75,-1.5)
  silkscreen extent -1.75,-1.7 1.2,0.55, body extent -1.4,-1.75 1.4,1.75, height 1.91
B2P-VH [mil] "Connector JST VH series 2 way 3.96mm pitch"
  rect 112x112 hole 64.96: 1(0,0)
  round 112 hole 64.96: 2(155.91,0)
  silkscreen extent -77,-190 233,144, body extent -77,-190 232,145, height 430
B3P-VH [mil] "Connector JST VH series 3 way 3.96mm pitch"
  rect 112x112 hole 64.96: 1(0,0)
  round 112 hole 64.96: 2(155.91,0) 3(311.81,0)
  silkscreen extent -77,-190 389,144, body extent -77,-190 388,145, height 431
B04B-PASK-1 [mm] "JST B04B-PASK-1 2mm Connector"
  round 1.6 hole 0.87: 1(3,0) 2(1,0) 3(-1,0) 4(-3,0)
  round 0 hole 1.1 unplated: 11(4.5,1.7)
  silkscreen extent -5,-3.1 5,2.2, body extent -5,-3.1 5,2.2, height 7.7
B06B-PASK-1 [mm] "JST B07B-PASK-1 2mm Connector"
  round 1.6 hole 0.87: 1(5,0) 2(3,0) 3(1,0) 4(-1,0) 5(-3,0) 6(-5,0)
  round 0 hole 1.1 unplated: 11(6.5,1.7)
  silkscreen extent -7,-3.1 7,2.2, body extent -7,-3.1 7,2.2, height 7.72
CAPC1608X08L [mm] "Chip Capacitor, 2-Leads, Body 1.6x0.8mm, IPC High Density"
  rect 0.85x0.8 smd: 1(-0.625,0) 2(0.625,0)
  body extent -0.8,-0.43 0.8,0.44, height 0.8
CAPC2012X15M [mm] "Chip Capacitor, 2-Leads, Body 2.0x1.3mm, IPC Low Density"
  rect 1.55x1.6 smd: 1(-0.975,0) 2(0.975,0)
  silkscreen extent -2.17,-1.25 2.17,1.25, body extent -1,-0.63 1,0.64, height 1.47
CAPCP2012X11N [mm] "Chip Capacitor, 2-Leads, Body 2.0x1.3mm, IPC Medium Density"
  rect 1.1x1.4 smd: 1(-0.95,0) 2(0.95,0)
  silkscreen extent -2.04,-1.02 1.78,1.02, body extent -1,-0.63 1,0.64, height 1.12
FAIR-SOT23-3_V [mm] "SOT23, 3-Leads, Body 3.12x1.5mm, Pitch 0.95mm"
  rect 1.4x1 smd: 1(-1.1,0.95) 2(-1.1,-0.95) 3(1.1,0)
  silkscreen extent -1.22,-1.55 0.75,2.13, body extent -1.35,-1.56 1.35,1.56, height 1.2
FIDRT [mil] "Fiducial 1mm round"
  round 40 smd paste-19.68 mask+20: 0(0,0)
  Top Layer keep-out circle w3.94: c0,0 r39.37
FP-LQFP32-5V-MFG [mm]
  rect 1.2x0.5 smd paste+0 mask+0: 1(-4.25,2.8) 2(-4.25,2) 3(-4.25,1.2) 4(-4.25,0.4) 5(-4.25,-0.4) 6(-4.25,-1.2) 7(-4.25,-2) 8(-4.25,-2.8) 17(4.25,-2.8) 18(4.25,-2) 19(4.25,-1.2) 20(4.25,-0.4) 21(4.25,0.4) 22(4.25,1.2) 23(4.25,2) 24(4.25,2.8)
  rect 0.5x1.2 smd paste+0 mask+0: 9(-2.8,-4.25) 10(-2,-4.25) 11(-1.2,-4.25) 12(-0.4,-4.25) 13(0.4,-4.25) 14(1.2,-4.25) 15(2,-4.25) 16(2.8,-4.25) 25(2.8,4.25) 26(2,4.25) 27(1.2,4.25) 28(0.4,4.25) 29(-0.4,4.25) 30(-1.2,4.25) 31(-2,4.25) 32(-2.8,4.25)
  silkscreen extent -5.57,-3.6 3.6,3.6, body extent -4.5,-4.5 4.5,4.5, height 1.6
FP-SOT223-3LD-PL-1-IPC_C [mm]
  rect 1.454x0.882 smd paste+0 mask+0: 1(-3.075,2.3)
  rrect100% 1.454x0.882 smd paste+0 mask+0: 2(-3.075,0) 3(-3.075,-2.3)
  rrect61% 1.454x3.182 smd paste+0 mask+0: 4(3.075,0)
  silkscreen extent -4.45,-3.25 1.6,3.25, body extent -3.9,-3.35 3.9,3.35, height 0.25
MLPAK33_SOT8002-1_NEX-M [mil]
  rect 32x12 smd paste+0 mask+0: 1(-69,38.39) 2(-69,12.8) 3(-69,-12.8) 4(-69,-38.39) 5(69,-38.39) 6(69,-12.8) 7(69,12.8) 8(69,38.39)
  Top Layer region: 57.98,-52 57.98,52 -32,52 -32,-52
  silkscreen extent -105,-69 66,69, body extent -69,-64 69,64, height 35
MT3PF [mm] "M3 Mounting Hole Plated"
  round 7 hole 3.5: 1(0,0)
  silkscreen extent -3.9,-3.9 3.9,3.9
PCB [mm] "BOM Entry for PCB"
RESC1608X06L [mm] "Chip Resistor, 2-Leads, Body 1.6x0.8mm, IPC High Density"
  rect 0.8x0.9 smd: 1(-0.7,0) 2(0.7,0)
  silkscreen extent -0.1,-0.35 0.1,0.35, body extent -0.85,-0.48 0.85,0.48, height 0.55
S1751-46R [mm] "SM Testpoint - Harwin S1751-46R"
  rect 3.45x1.85 smd: 1(0,0)
  silkscreen extent -1.9,-1.1 1.9,1.1, body extent -1.57,-0.8 1.67,0.85, height 2
SOIC127P1032X265-16N [mm]
  rect 1.925x0.65 smd: 1(-4.712,4.445) 2(-4.712,3.175) 3(-4.712,1.905) 4(-4.712,0.635) 5(-4.712,-0.635) 6(-4.712,-1.905) 7(-4.712,-3.175) 8(-4.712,-4.445) 9(4.712,-4.445) 10(4.712,-3.175) 11(4.712,-1.905) 12(4.712,-0.635) 13(4.712,0.635) 14(4.712,1.905) 15(4.712,3.175) 16(4.712,4.445)
  silkscreen extent -5.68,-5.15 3.4,5.15, body extent -5.32,-5.25 5.32,5.25, height 2.66
SOT95P237X112-3L [mm] "SOT23, 3-Leads, Body 3.0x2.6mm (max), Pitch 0.95mm, IPC High Density"
  rect 1.3x0.6 smd: 1(-0.85,0.95) 2(-0.85,-0.95) 3(0.85,0)
  silkscreen extent -0.77,-1.5 0.7,1.65, body extent -1.25,-1.5 1.25,1.5, height 1.09
SOT95P237X112-3M [mm] "SOT23, 3-Leads, Body 3.0x2.6mm (max), Pitch 0.95mm, IPC Low Density"
  rect 1.9x0.6 smd: 1(-0.95,0.95) 2(-0.95,-0.95) 3(0.95,0)
  silkscreen extent -1.07,-1.5 0.7,1.92, body extent -1.25,-1.5 1.25,1.5, height 1.09
SOT95P280X145-5L [mm] "SOT23, 5-Leads, Body 3.0x3.0mm (max), Pitch 0.95mm, IPC High Density"
  rect 0.9x0.6 smd: 1(-1.2,0.95) 2(-1.2,0) 3(-1.2,-0.95) 4(1.2,-0.95) 5(1.2,0.95)
  silkscreen extent -1.7,-1.5 0.35,1.7, body extent -1.6,-1.55 1.6,1.55, height 1.45
SW_KSR [mm] "Switch SMD SPST-NO Vertical ITT/Cannon KSR231GLFS"
  rect 1x1.4 smd: 1(-3.5,0) 2(3.5,0)
  silkscreen extent -3,-1.9 3,1.9, body extent -3.65,-1.95 3.65,1.95, height 2.5
TC2030-IDC [mm] "Tag-Connect 6-Pin with Legs (PN# TC2030-IDC-NL)"
  round 2.3 hole 2.375: 0(0,2.54) 0(0,-2.54) 0(3.175,-2.54) 0(3.175,2.54)
  round 0.9 hole 0.995: 0(0,0) 0(5.08,-1.016) 0(5.08,1.016)
  round 0.79 smd paste-0.39: 1(1.27,-0.635) 2(1.27,0.635) 3(2.54,-0.635) 4(2.475,0.5) 5(3.89,-0.635) 6(3.81,0.635)
  Keep-Out Layer region: 1.27,-0.635 3.81,-0.635 3.81,0.635 1.27,0.635
  silkscreen extent -1.4,-3.94 5.71,3.94
TP1 [mm]
  round 1 smd paste-0.5: 1(0,0)

## Part data
A1: library part "Misc PCB", "PCB (Bare Board)", Supplier Part Number 1="XXXXXX Rev A", Class="PCB BOM Entry", Created=31/05/2013, Last_Updated=31/05/2013, Source="Misc PCB"
C1A C1B C2A C2B C3A C3B C5A C5B C7A C7B C8A C8B C9A C9B C10A C10B C11A C11B C12A C12B C12C C12D: library part FEC882-0023, "Capacitor MLC 100nF 50V X7R 10% CAPC1608X08M", Dielectric=X7R, Manufacturer=Murata, ManuPartNo=GRM188R71H104KA93D, Supplier Part Number 1=8820023, Tolerance=10%, Voltage=50V, Class="Capacitor MLC", Cost 1+=0.064, Cost 1K+=0.039, Created=25/01/2013, Last_Updated=25/01/2013, Life=V, RoHS=Y, Source=FEC882-0023, Supplier 1=Farnell
C4A C4B: library part FEC3013414, "Capacitor MLC 1uF 25V X7R 10% CAPC1608X08M", Dielectric=X7R, Manufacturer=Samsung, ManuPartNo=CL10B105KA8NFNC, Supplier Part Number 1=3013414, Tolerance=10%, Voltage=25V, Class="Capacitor MLC", ComponentLink1Description=Datasheet, ComponentLink1URL="C:\Altium SANDBOX\Component Database\Datasheet\2710598.pdf", Cost 1+=0.0261, Cost 1K+=0.0112, Created=11/05/2021, Last_Updated=11/05/2021, Life=V, RoHS=Y, Source=FEC3013414, Supplier 1=Farnell
C6A C6B: library part Mouser81-GRM21BR71A106KE51, "Capacitor MLC 10uF10V X7R 10% CAPC2012X15M", Dielectric=X7R, Manufacturer=Murata, ManuPartNo=GRM21BR71A106KE51L, Supplier Part Number 1=81-GRM21BR71A106KE51, Tolerance=10%, Voltage=10V, Class="Capacitor MLC", Cost 1+=0.189, Cost 1K+=0.046, Created=21/12/2016, Last_Updated=21/12/2016, Life=V, RoHS=Y, Source=Mouser81-GRM21BR71A106KE51, Supplier 1=Mouser
D8A D8B: library part FEC146-7518, "Diode Schottky BAT54C SOT-23", Manufacturer=Fairchild, ManuPartNo=BAT54C, Supplier Part Number 1=1467518, Class="Diode Schottky", ComponentLink1Description=Datasheet, ComponentLink1URL="C:\Altium SANDBOX\Component Database\Datasheet\BAT54 Fairchild.pdf", Cost 1+=0.117, Cost 1K+=0.0297, Created=16/12/2013, If (mA)=200, Last_Updated=26/06/2018, Life=V, Ptot (mW)=290, RoHS=Y, Source=FEC146-7518, Supplier 1=Farnell, Vf=0.8V, Vr (V)=30V
FID1 FID2 FID3 FID4 FID5 FID6: library part "Misc FIDT", "Fiducial 1mm Dot Component Side", Supplier Part Number 1=FIDT, Class="Fiducial Dot", Created=31/05/2013, Last_Updated=31/05/2013, Source="Misc FIDT", Supplier 1=Misc
H1 H2 H3 H4: library part "Misc MT3P", "Mounting Hole M3 Plated", Supplier Part Number 1=MT3P, Class="Mounting Hole", Created=18/09/2013, Last_Updated=18/09/2013, Source="Misc MT3P", Supplier 1=Misc
IC1A IC1B: library part ADM2463EBRWZ, "Integrated Circuit", Manufacturer_Name="Analog Devices", Mouser Part Number=584-ADM2463EBRWZ, Arrow Part Number=ADM2463EBRWZ, Arrow Price/Stock=https://www.arrow.com/en/products/adm2463ebrwz/analog-devices?region=nac, Datasheet Link=https://www.analog.com/media/en/technical-documentation/data-sheets/adm2461e_adm2463e.pdf, Height=2.65mm, Manufacturer_Part_Number=ADM2463EBRWZ, Mouser Price/Stock=https://www.mouser.co.uk/ProductDetail/Analog-Devices/ADM2463EBRWZ?qs=GBLSl2Akirt8AylNhtgjyg%3D%3D
J1A J1B J1C J1D: library part FEC949-2011, "Connector 3 Way Vertical JST B3P-VH(LF)(SN) 3.96mm Pitch", DistPartNo=949-2011, Manufacturer=JST, ManuPartNo=B3P-VH(LF)(SN), Class=Connector, Cost 1+=0.171, Cost 1K+=0.093, Created=29/05/2013, Distributor=FEC, Last_Updated=29/05/2013, Life=V, Orient#=Vertical, Pin Count=3, Pitch=3.96mm, RoHS=Y, Source=FEC949-2011
J2: library part FEC183-0743, "Connector 6 Way Vertical B06B-PASK-1 (LF) (SN) 2mm Pitch", Manufacturer=JST, ManuPartNo="B06B-PASK-1 (LF) (SN)", Supplier Part Number 1=1830743, Class=Connector, Cost 1+=0.55, Cost 1K+=0.2, Created=21/06/2013, Last_Updated=21/06/2013, Life=V, Orient=Vertical, Pin Count=6, Pitch=2mm, RoHS=Y, Source=FEC183-0743, Supplier 1=Farnell
J3A J3B J3C J3D: library part FEC949-2003, "Connector 2 Way Vertical JST B2P-VH(LF)(SN) 3.96mm Pitch", Manufacturer=JST, ManuPartNo=B2P-VH(LF)(SN), Supplier Part Number 1=9492003, Class=Connector, Cost 1+=0.128, Cost 1K+=0.074, Created=13/06/2013, Last_Updated=13/06/2013, Life=V, Orient#=Vertical, Pin Count=2, Pitch=3.96mm, RoHS=Y, Source=FEC949-2003, Supplier 1=Farnell
J7A J7B: library part RS512-8608, "Connector 4 Way Vertical JST B04B-PASK-1 (LF) (SN) 2mm Pitch", Manufacturer=JST, ManuPartNo="B04B-PASK-1 (LF) (SN)", Supplier Part Number 1=512-8608, Class=Connector, Cost 1+=0.26, Cost 1K+=0.24, Created=05/06/2013, Last_Updated=05/06/2013, Life=V, Orient=Vertical, Pin Count=4, Pitch=2mm, RoHS=Y, Source=RS512-8608, Supplier 1=RSComponents
J8A J8B: library part TC2030-IDC, "TC2030 Tag Connect Programmer Connection - Non BOM part", Manufacturer="Tag Connect", ComponentLink1Description=Datasheet, ComponentLink1URL="C:\Altium SANDBOX\Component Database\Datasheet\TC2030-CTX.pdf", Created=16/10/2017, Last_Updated=16/10/2017, Life=V, Orient=Vertical, Pin Count=6, RoHS=Y, Source=TC2030-IDC
LED1A LED1B: library part FEC2401105, "LED RGB, SMD, 2.4mm, 115 °", Manufacturer=Wurth, ManuPartNo=ASMB-MTB0-0A3A2, Supplier Part Number 1=2401105, Class=LED, ComponentLink1Description=Datasheet, ComponentLink1URL="C:\Altium SANDBOX\Component Database\Datasheet\2343968.pdf", Cost 1+=0.278, Cost 1K+=0.141, Created=09/03/2018, IF Max (mA)=20, IF Typ (mA)=20, Last_Updated=09/03/2018, Life=V, RoHS=Y, Source=FEC2401105, Supplier 1=Farnell, View Angle=115
LED2A LED2B LED2C LED2D: library part RS692-0907, "LED 2.0x1.25mm GREEN 0805 LTST-C170KGKT", Manufacturer=Liteon, ManuPartNo=LTST-C170KGKT, Supplier Part Number 1=692-0907, Class="LED 0805 Green", ComponentLink1Description=Datasheet, ComponentLink1URL="C:\Altium SANDBOX\Component Database\Datasheet\LTST-C170KGKT.pdf", Cost 1+=0.169, Cost 1K+=0.071, Created=05/08/2013, IF Max (mA)=80, IF Typ (mA)=30, Last_Updated=05/08/2013, Life=V, RoHS=Y, Source=RS692-0907, Supplier 1=RSComponents, View Angle=130
Q1A Q1B Q1C Q1D Q6A Q6B Q6C Q6D: library part FEC3934789, "Power MOSFET, P Channel, 30 V, 15.2 A, 0.0111 ohm, MLPAK33, Surface Mount", Manufacturer=NEXPERIA, ManuPartNo=PXP012-30QLJ, Supplier Part Number 1=3934789, Class="Transistor MOSFET P", ComponentLink1Description=Datasheet, ComponentLink1URL="C:\Altium SANDBOX\Component Database\Datasheet\3679934.pdf", Cost 1+=0.598, Cost 1K+=0.207, Created=24/09/2025, Id=8.9, Last_Updated=24/09/2025, Life=V, Pd (mW)=1700, Rds(on)=0.0111, RoHS=Y, Source=FEC3934789, Supplier 1=Farnell, Vds=30, Vgs=25
Q2A Q2B Q4A Q4B Q5A Q5B: library part FEC205-3833, "Transistor MOSFET BSS138BK SOT-23", Manufacturer=NXP, ManuPartNo=BSS138BK, Supplier Part Number 1=2053833, Class="Transistor MOSFET", ComponentLink1Description=Datasheet, ComponentLink1URL="C:\Altium SANDBOX\Component Database\Datasheet\BSS138BK.pdf", Cost 1+=0.0395, Cost 1K+=0.0237, Created=01/06/2015, Id=0.36, Last_Updated=29/09/2015, Pd (mW)=350, Rds(on)=1.6, Source=FEC205-3833, Supplier 1=Farnell, Vds=60, Vgs=20
Q3A Q3B Q3C Q3D: library part CMP-013-00021-3, "N-Channel Logic Level Enhancement Mode Field Effect Transistor, 220 mA, 50 V, -55 to 150 degC, 3-Pin SOT-23, RoHS, Tape and Reel", Case/Package=TO-236-3, Input Capacitance=27pF, Manufacturer=Fairchild, Max Operating Temperature=150°C, Min Operating Temperature=-55°C, Nominal Dual Supply Voltage=50V, Package Description="3-Pin Small Outline Transistor, Body 2.92 x 1.325 mm, Pitch 0.95 mm", Package Quantity=1, Package Reference=SOT23-3, Package Version="Rev. 12, 03/2016", Power=360mW, Resistance=0.7Ohm, Datasheet URL=https://www.fairchildsemi.com/datasheets/BS/BSS138.pdf, Datasheet Version="Rev. C, 10/2005", Elements=1, Mounting Technology=SM, Nominal Vgs=1.3V, Packaging=TapeandReel, Pins=3, Rds On Max=3.5Ohm, RoHS Compliant=True, Typical Rise Time=9ns
R1A R1B R1C R1D R3A R3B R3C R3D R37A R37B: library part FEC933-0399, "Resistor 10K 1% 50V RESC1608X06M", Manufacturer=Multicomp, ManuPartNo="MC 0.063W 0603 1% 10K", Supplier Part Number 1=9330399, Tolerance=1%, Voltage=50V, Class=Resistor, Cost 1+=0.021, Cost 1K+=0.015, Created=23/01/2013, Last_Updated=23/01/2013, Life=V, RoHS=Y, Source=FEC933-0399, Supplier 1=Farnell
R2A R2B R2C R2D: library part PanasonicERA3AEB303V, "SMD Chip Resistor, Thin Film, 30 kohm, 75 V, 0603 [1608 Metric], 100 mW, ± 0.1%, ERA3A Series", Manufacturer=Panasonic, ManuPartNo=ERA3AEB303V, Power=100mW, Supplier Part Number 1=1670196, Tolerance=0.1%, Voltage=75V, Class=Resistor, ComponentLink1Description=Datasheet, ComponentLink1URL="C:\Altium SANDBOX\Component Database\Datasheet\Panasonic Resistors.pdf", Cost 1+=0.0538, Cost 1K+=0.0349, Created=19/09/2025, Last_Updated=19/09/2025, Life=V, RoHS=Y, Source=PanasonicERA3AEB303V, Supplier 1=Farnell
R4A R4B R4C R4D: library part PanasonicERA3AEB103V, "SMD Chip Resistor, Thin Film, 10 kohm, 75 V, 0603 [1608 Metric], 100 mW, ± 0.1%, ERA3A Series", Manufacturer=Panasonic, ManuPartNo=ERA3AEB103V, Power=100mW, Supplier Part Number 1=1577619, Tolerance=0.1%, Voltage=75V, Class=Resistor, ComponentLink1Description=Datasheet, ComponentLink1URL="C:\Altium SANDBOX\Component Database\Datasheet\Panasonic Resistors.pdf", Cost 1+=0.237, Cost 1K+=0.053, Created=27/02/2018, Last_Updated=27/02/2018, Life=V, RoHS=Y, Source=PanasonicERA3AEB103V, Supplier 1=Farnell
R8A R8B R9A R9B R16A R16B R17A R17B R18A R18B: library part FEC933-1247, "Resistor 4K7 1% 50V RESC1608X06M", Manufacturer=Multicomp, ManuPartNo="MC 0.063W 0603 1% 4K7", Supplier Part Number 1=9331247, Tolerance=1%, Voltage=50V, Class=Resistor, Cost 1+=0.021, Cost 1K+=0.015, Created=23/01/2013, Last_Updated=23/01/2013, Life=V, RoHS=Y, Source=FEC933-1247, Supplier 1=Farnell
R13A R13B: library part YageoRC0603FR-0715RL, "SMD Chip Resistor, Thick Film, 15 ohm, 50 V, 0603 [1608 Metric], 100 mW, ± 1%, RC Series", Manufacturer=Yageo, ManuPartNo=RC0603FR-0715RL, Power=100mW, Supplier Part Number 1=9238263, Tolerance=1%, Voltage=50V, Class=Resistor, ComponentLink1Description=Datasheet, ComponentLink1URL="C:\Altium SANDBOX\Component Database\Datasheet\Yageo RC_L Series.pdf", Cost 1+=0.01, Cost 1K+=0.004, Created=03/11/2017, Last_Updated=03/11/2017, Life=V, RoHS=Y, Source=YageoRC0603FR-0715RL, Supplier 1=Farnell, XjtagCategorisation=resistor.pdd
R14A R14B: library part YageoRC0603FR-0724RL, "SMD Chip Resistor, Thick Film, 24 ohm, 50 V, 0603 [1608 Metric], 100 mW, ± 1%, RC Series", Manufacturer=Yageo, ManuPartNo=RC0603FR-0724RL, Power=100mW, Supplier Part Number 1=311-24.0HRCT-ND, Tolerance=1%, Voltage=50V, Class=Resistor, ComponentLink1Description=Datasheet, ComponentLink1URL="C:\Altium SANDBOX\Component Database\Datasheet\Yageo RC_L Series.pdf", Cost 1+=0.01, Cost 1K+=0.004, Created=03/11/2017, Last_Updated=03/11/2017, Life=V, RoHS=Y, Source=YageoRC0603FR-0724RL, Supplier 1=Digi-Key, XjtagCategorisation=resistor.pdd
R15A R15B: library part YageoRC0603FR-0768RL, "SMD Chip Resistor, Thick Film, 68 ohm, 50 V, 0603 [1608 Metric], 100 mW, ± 1%, RC Series", Manufacturer=Yageo, ManuPartNo=RC0603FR-0768RL, Power=100mW, Supplier Part Number 1=9238344, Tolerance=1%, Voltage=50V, Class=Resistor, ComponentLink1Description=Datasheet, ComponentLink1URL="C:\Altium SANDBOX\Component Database\Datasheet\Yageo RC_L Series.pdf", Cost 1+=0.01, Cost 1K+=0.004, Created=03/11/2017, Last_Updated=03/11/2017, Life=V, RoHS=Y, Source=YageoRC0603FR-0768RL, Supplier 1=Farnell, XjtagCategorisation=resistor.pdd
R22A R22B R22C R22D: library part FEC933-1344, "Resistor 560R 1% 50V RESC1608X06M", Manufacturer=Multicomp, ManuPartNo="MC 0.063W 0603 1% 560R", Supplier Part Number 1=9331344, Tolerance=1%, Voltage=50V, Class=Resistor, Cost 1+=0.021, Cost 1K+=0.015, Created=23/01/2013, Last_Updated=23/01/2013, Life=V, RoHS=Y, Source=FEC933-1344, Supplier 1=Farnell
SB1A SB1B SB2A SB2B SB3A SB3B SB4A SB4B: "Solder Blob - Closed 0603 SM pads", Created=13/10/2017, Last_Updated=13/10/2017, Life=V, Pin Count=2, RoHS=Y, Source="Solder Blob Closed"
SW1A SW1B SW2A SW2B: library part FEC120-1422, "Switch SMD SPST-NO Vertical ITT/Cannon KSR231GLFS", Manufacturer=ITT/Cannon, ManuPartNo=KSR231GLFS, Supplier Part Number 1=1201422, Class="Switch SMD", Cost 1+=0.77, Cost 1K+=0.54, Created=18/09/2013, Last_Updated=18/09/2013, Life=V, Orient=Vertical, RoHS=Y, Source=FEC120-1422, Supplier 1=Farnell, Switch Type=SPST-NO
TP1A TP1B TP2A TP2B TP3A TP3B: library part FEC2293786, "PCB Test Point S1751 Series, Surface Mount", Manufacturer=Harwin, ManuPartNo=S1751-46R, Supplier Part Number 1=2293786, Class=Connector, ComponentLink1Description=Datasheet, ComponentLink1URL="C:\Altium SANDBOX\Component Database\Datasheet\S1751-46R.pdf", Cost 1+=0.134, Cost 1K+=0.106, Created=16/10/2017, Last_Updated=01/12/2017, Life=V, Orient=Vertical, Pin Count=1, RoHS=Y, Source=FEC2293786, Supplier 1=Farnell
TP4A TP4B TP5A TP5B TP6A TP6B TP7A TP7B TP8A TP8B TP9A TP9B TP10A TP10B TP11A TP11B: library part "Misc TP1", "Testpoint 1mm dia. Component side, no silk", Supplier Part Number 1=TP1, Class=Testpoint, Created=26/01/2013, Last_Updated=26/01/2013, Source="Misc TP1", Supplier 1=Misc
U1A U1B: library part FEC845-7255, "IC Supply Voltage Monitor, 2.93V TPS3828-33DBVT SOT23-5", Manufacturer=Texas, ManuPartNo=TPS3828-33DBVT, Supplier Part Number 1=8457255, Class="IC Sensor", ComponentLink1Description=Datasheet, ComponentLink1URL="C:\Altium SANDBOX\Component Database\Datasheet\TPS3828.pdf", Cost 1+=1.08, Cost 1K+=0.73, Created=10/06/2013, Last_Updated=10/06/2013, Life=V, RoHS=Y, Source=FEC845-7255, Supplier 1=Farnell
U2A U2B: library part CMP-06324-000085-1, "IC REG LIN 3.3V 100MA SOT223-3", Case/Package=SOT-223, Dropout Voltage=230mV, Max Input Voltage=26V, Max Operating Temperature=125°C, Min Current Limit=100mA, Min Input Voltage=2.5V, Min Operating Temperature=-40°C, Nominal Output Voltage=3.3V, Lead Free="Lead Free", Mount="Surface Mount", Number of Pins=3, Number of Regulators=1, Output Current=100mA, Output Type=Fixed, Output Voltage=3.3V, Packaging=Rail/Tube, REACH SVHC="No SVHC"
U6A U6B: library part CMP-12105-000012-1, "IC MCU 32BIT 16KB FLASH 32LQFP", Ambient Temperature Range High=+85°C, Ambient Temperature Range Low=-40°C, Frequency=32MHz, Manufacturer=STMicroelectronics, Manufacturer Part Number=STM32L011K4T6, Max Junction Temp=+105°C, Max Supply Voltage=3.6V, Min Supply Voltage=1.65V, Nominal Supply Current=500-1500uA, Package=LQFP32-5V, Temperature="-40°C to +85°C", Automotive=No, Category=IC, ComponentLink2Description=Datasheet, ComponentLink2URL=https://www.st.com/content/ccc/resource/technical/document/datasheet/42/c0/ab/e5/71/7a/47/0b/DM00206508.pdf/files/DM00206508.pdf/jcr:content/translations/en.DM00206508.pdf, Core Architecture="Arm Cortex-M0+", Data Bus Width=32bits, Device Class L1="Integrated Circuits (ICs)", Device Class L2="Embedded Processors and Controllers", Device Class L3=Microcontrollers, Digikey Description="IC MCU 32BIT 16KB FLASH 32LQFP", Height=1.6mm, Interface=I2C,SPI,UART,USART,IrDA, Ipc Land Pattern Name=QFP80P900X900X160-32, Lead Free=Yes, Memory Size=16KBytes, Memory Type=FLASH, Mouser Description="ARM Microcontrollers - MCU Ultra-low-power ARM Cortex-M0+ MCU with 16-Kbytes Flash, 32 MHz CPU", Number Of A/D Converters=1, Number Of Adc Channels=10, Number Of Cores=1, Number Of I2C Channels=1, Number of I/Os=26, Number Of Spi Channels=1, Number Of Timers/Counters=8, Number Of Uart Channels=2, Octopart=https://octopart.com/stm32l011k4t6-stmicroelectronics-71108062, Ram Size=2KBytes, RoHS=TRUE, Standoff Height=0.05mm, Temperature Range High=+85°C, Temperature Range Low=-40°C